# Altium PCB STM32F0 Bigger version 3.PcbDoc
Units mil, origin at the board's own origin, x right, y up, seen from the top; angles counter-clockwise.
Board outline 1865.23 x 1135.12 mil, 2 copper layers (Top Layer, Bottom Layer); 23 components, 26 nets, 129 pads, 11 vias.
Unrouted connection lines stored in the file: 2.
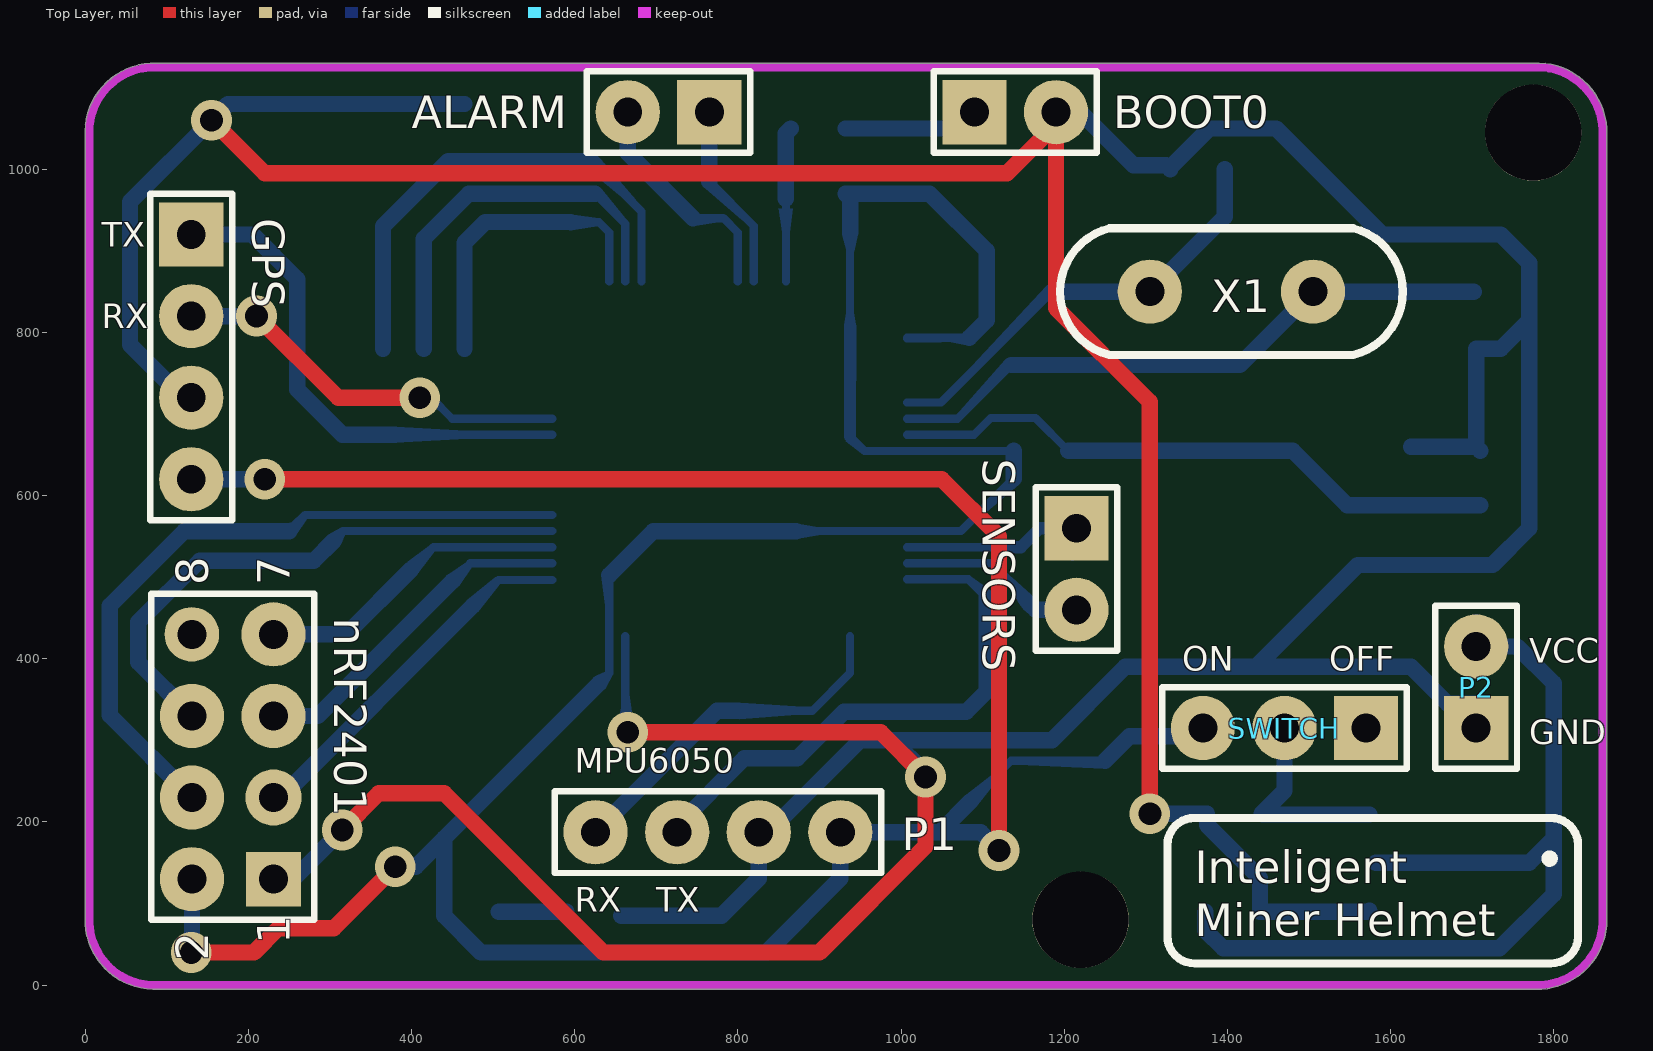
[diagram p0: Top Layer view]
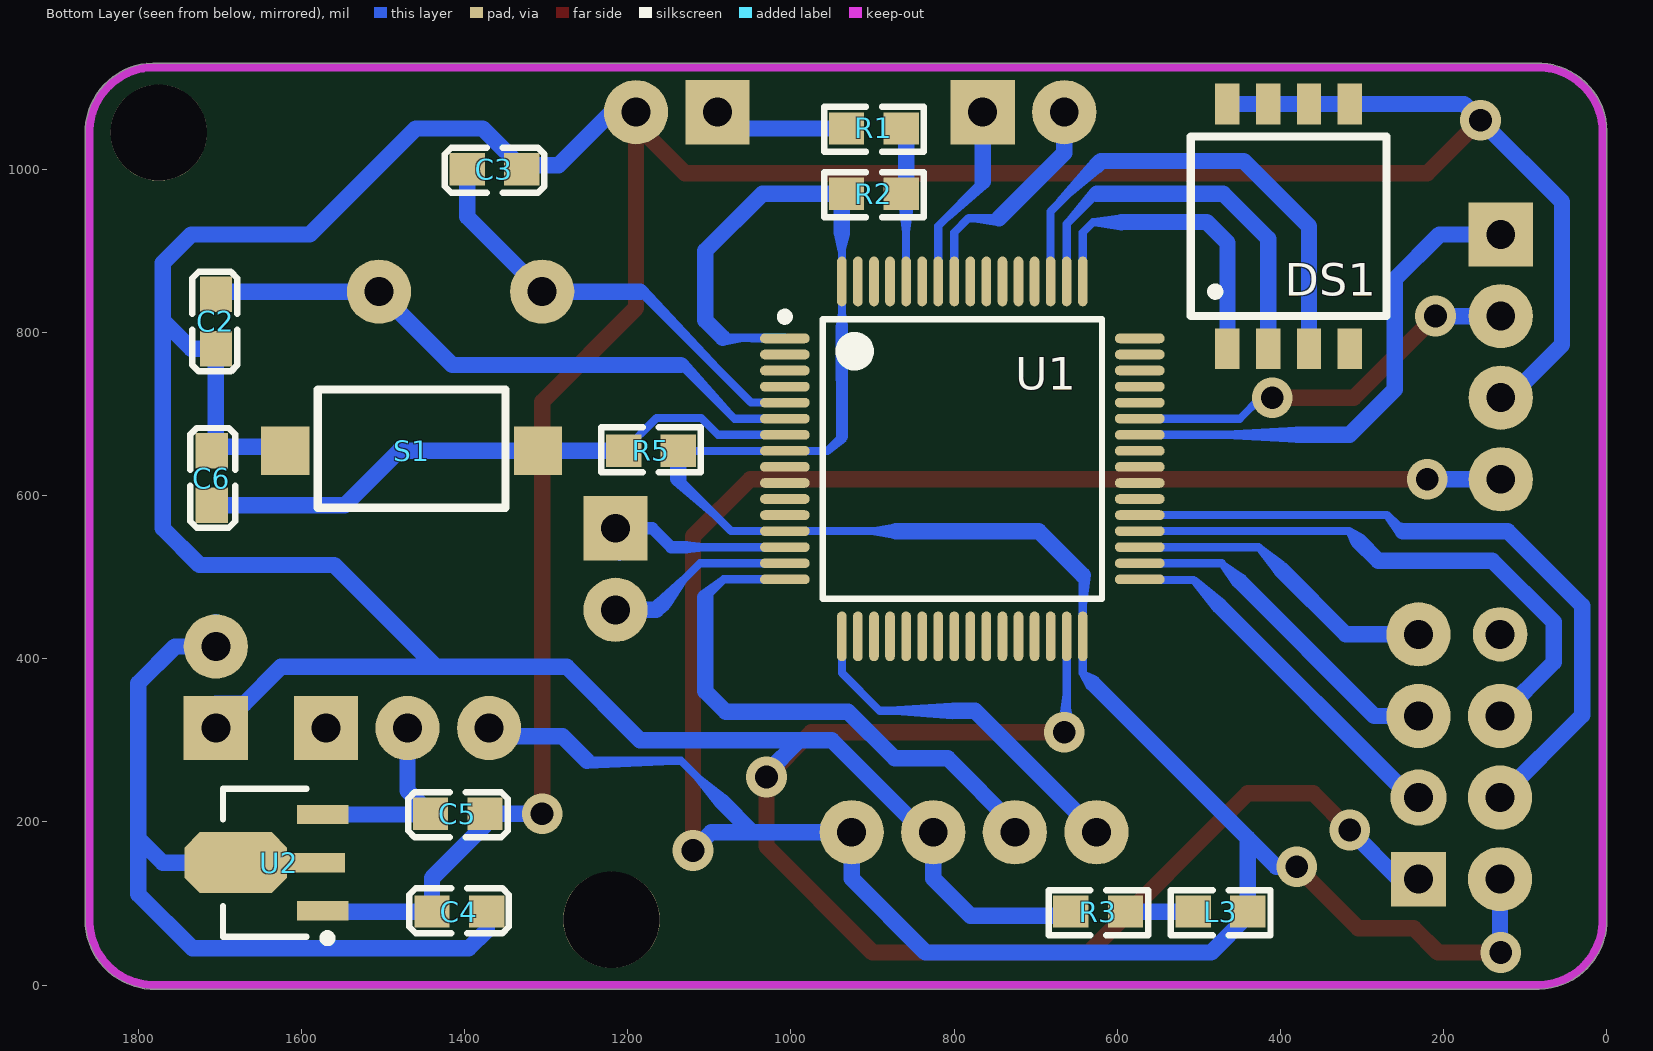
[diagram p1: Bottom Layer view, seen from below]

## Layer stack, top to bottom
Top Solder: solder mask 0.4, Solder Resist, Dk 3.5
Top Layer: signal copper 1.4
Dielectric 1: dielectric 12.6, FR-4, Dk 4.8
Bottom Layer: signal copper 1.4
Bottom Solder: solder mask 0.4, Solder Resist, Dk 3.5

## Board outline
-0.01,75 -0.01,1039.85 cw(c85,1045) 79.69,1130.01 cw(c80,1125) 80,1130.01 1774.85,1130.01 cw(c1780,1045) 1865.01,1050.31 cw(c1860,1050) 1865.02,1050 1865.02,85.15 cw(c1780,80) 1865.17,80 cw(c1780,80) 1785.31,-5.01 cw(c1785,0) 1785,-5.01 90.15,-5.01 cw(c85,80) -0.01,74.69 cw(c5,75)

## Design rules (kind name [scope] priority, off if disabled: settings)
Clearance [All] p1: gap=6
PolygonConnect [All] p1: connectstyle=Relief reliefconductorwidth=10 reliefentries=4 polygonreliefangle="90 Angle" airgapwidth=10
RoomDefinition STM32F0 [InComponentClass('STM32F0')] p1: confinementstyle=ConfineIn formatcopy=TRUE lockcomponents=FALSE outline 1860,0 0,0 0,1130 1860,1130
RoutingVias [All] p1: holewidth=28 width=50 viastyle="Through Hole" minholewidth=28 minwidth=50 maxholewidth=28 maxwidth=50
SolderMaskExpansion [All] p1: expansion=4
Width [All] p1: maxlimit=25 minlimit=10 preferedwidth=20
29 further rules are at their usual default settings.

## Classes and differential pairs
component class STM32F0: ALARM BOOT0 C2 C3 C4 C5 C6 DS1 GPS L3 nRF2401 P1 P2 R1 R2 R3 R5 S1 U1 X1

## Components (designator, comment, footprint, x,y, rotation, side; value= is the part's Value field where it differs from the comment)
ALARM "Header 2" HDR1X2#1 765,1070 r0 top
BOOT0 "Header 2" HDR1X2#2 1090,1070 r0 top (schematic designator P4)
C2 "Cap" CAP-0603 1705,780 r90 bottom
C3 "Cap" CAP-0603 1330,1000 r0 bottom
C4 "Cap" CAP-0603 1440,90 r180 bottom
C5 "Cap" CAP-0603 1375,210 r0 bottom
C6 "Cap" CAP-0603 1710,655 r270 bottom
DS1 "Dial Switch" DS-P4 410,935 r0 bottom
GPS "Header 4" HDR1X4#1 130,920 r270 top (schematic designator P3)
L3 "LED" RES-0603 440,90 r0 bottom
nRF2401 "Header 4X2" HDR2X4 230.81,129.9 r90 top (schematic designator P5)
P1 "Header 4" HDR1X4#2 925.59,187.36 r180 top
P2 "Header 2" HDR1X2#2 1705,315 r90 top
R1 "510" RES-0603 865,1050 r0 bottom
R2 "10K" RES-0603 865,970 r0 bottom
R3 "1K" RES-0603 590,90 r0 bottom
R5 "100K" RES-0603 1205,655 r180 bottom
S1 "SW-SPST" CP-SW 1310,655 r0 bottom
SENSORS "Comment" HDR1X2#1 1215,560 r90 top
SWITCH "Comment" HDR1X3 1570,315 r0 top
U1 "STM32F051R8" LQFP64_L 790,645 r180 bottom
U2 "HT7333" SOT89N 1645,150 r0 bottom
X1 "XTAL" 晶振-1 1505,850 r180 top

## Footprints (in the part's own frame and the unit in brackets; to place one, negate y for a bottom-side part, rotate by r counter-clockwise, add the part's x,y. Pads: shape width x height; smd on the part's side, far side on the other; paste and mask are expansions set on the pad)
CAP-0603 [mm]
  rect 1.1x1 smd: 1(0,0) 2(1.7,0)
  silkscreen extent -0.71,-0.67 2.39,0.73
CP-SW [mm]
  rect 1.5x1.5 smd: 1(0,0) 2(7.874,0)
  silkscreen extent 1.02,-1.91 6.86,1.78
DS-P4 [mil]
  rect 29.92x50 smd: 1(55,155) 2(5,155) 3(-45,155) 4(-95,155) 5(55,-145) 6(5,-145) 7(-45,-145) 8(-95,-145)
  silkscreen extent -140,-105 100,115
HDR1X2#1 [mm] "Connector; Header; 2 Position"
  rect 2x2 hole 0.9: 1(0,0)
  round 2 hole 0.9: 2(-2.54,0)
  silkscreen extent -3.81,-1.27 1.27,1.27
HDR1X2#2 [mm] "Connector; Header; 2 Position"
  rect 2x2 hole 0.9: 1(0,0)
  round 2 hole 0.9: 2(2.54,0)
  silkscreen extent -1.27,-1.27 3.81,1.27
HDR1X3 [mm] "Connector; Header; 3 Position"
  rect 2x2 hole 0.9: 1(0,0)
  round 2 hole 0.9: 2(-2.54,0) 3(-5.08,0)
  silkscreen extent -6.35,-1.27 1.27,1.27
HDR1X4#1 [mm] "Connector; Header; 4 Position"
  rect 2x2 hole 0.9: 1(0,0)
  round 2 hole 0.9: 2(2.54,0) 3(5.08,0) 4(7.62,0)
  silkscreen extent -1.27,-1.27 8.89,1.27
HDR1X4#2 [mm] "Connector; Header; 4 Position"
  round 2 hole 0.9: 1(0,0) 2(2.54,0) 3(5.08,0) 4(7.62,0)
  silkscreen extent -1.27,-1.27 8.89,1.27
HDR2X4 [mm] "Connector; Header; 4x2 Position"
  rect 1.7x1.7 hole 0.9: 1(0,0)
  round 2 hole 0.9: 2(0,2.54) 4(2.54,2.54) 5(5.08,0) 6(5.08,2.54) 7(7.62,0)
  round 1.75 hole 0.9: 3(2.54,0)
  round 1.7 hole 0.9: 8(7.62,2.54)
  silkscreen extent -1.27,-1.27 8.89,3.81
LQFP64_L [mm] "Thin QFP, 64-Leads, Body 10x10mm, Pitch 0.5mm, IPC High Density"
  oval 1.55x0.301 smd: 1(-5.525,3.75) 2(-5.525,3.25) 3(-5.525,2.75) 4(-5.525,2.25) 5(-5.525,1.75) 6(-5.525,1.25) 7(-5.525,0.75) 8(-5.525,0.25) 9(-5.525,-0.25) 10(-5.525,-0.75) 11(-5.525,-1.25) 12(-5.525,-1.75) 13(-5.525,-2.25) 14(-5.525,-2.75) 15(-5.525,-3.25) 16(-5.525,-3.75) 33(5.525,-3.75) 34(5.525,-3.25) 35(5.525,-2.75) 36(5.525,-2.25) 37(5.525,-1.75) 38(5.525,-1.25) 39(5.525,-0.75) 40(5.525,-0.25) 41(5.525,0.25) 42(5.525,0.75) 43(5.525,1.25) 44(5.525,1.75) 45(5.525,2.25) 46(5.525,2.75) 47(5.525,3.25) 48(5.525,3.75)
  oval 0.301x1.55 smd: 17(-3.75,-5.525) 18(-3.25,-5.525) 19(-2.75,-5.525) 20(-2.25,-5.525) 21(-1.75,-5.525) 22(-1.25,-5.525) 23(-0.75,-5.525) 24(-0.25,-5.525) 25(0.25,-5.525) 26(0.75,-5.525) 27(1.25,-5.525) 28(1.75,-5.525) 29(2.25,-5.525) 30(2.75,-5.525) 31(3.25,-5.525) 32(3.75,-5.525) 49(3.75,5.525) 50(3.25,5.525) 51(2.75,5.525) 52(2.25,5.525) 53(1.75,5.525) 54(1.25,5.525) 55(0.75,5.525) 56(0.25,5.525) 57(-0.25,5.525) 58(-0.75,5.525) 59(-1.25,5.525) 60(-1.75,5.525) 61(-2.25,5.525) 62(-2.75,5.525) 63(-3.25,5.525) 64(-3.75,5.525)
  silkscreen extent -5.65,-4.35 4.35,4.55, body extent -5,-5 5,5, height 1.6
RES-0603 [mm] "1/10W"
  rect 1.1x1 smd: 1(0,0) 2(1.7,0)
  silkscreen extent -0.71,-0.67 2.39,0.73
SOT89N [mm] "SOT89, 3-Leads, Body 4.5x2.4 mm, Pitch 1.5mm, Lead Span 4.1mm, IPC Medium Density"
  rect 1.6x0.6 smd: 1(-1.8,1.5) 3(-1.8,-1.5)
  rect 1.8x0.6 smd: 2(-1.6,0)
  oct 3.2x1.9 smd: 2(0.9,0)
  silkscreen extent -2.07,-2.3 1.3,2.47, body extent -1.3,-2.3 1.3,2.3, height 1.6
晶振-1 [mm] "5.08MM"
  round 2 hole 0.9: 1(0,0) 2(5.08,0)
  silkscreen extent -2.79,-1.97 7.87,1.97

## Part data
ALARM BOOT0 P2: "Header, 2-Pin"
C2 C3 C4 C5 C6: "Capacitor"
DS1: library part DS-4
GPS P1: "Header, 4-Pin"
L3: "LED发光管"
nRF2401: "Header, 4-Pin, Dual row"
R1 R2 R3 R5: library part R, "电阻"
S1: "Single-Pole, Single-Throw Switch"
U1: library part STM32F051R8T6
U2: library part HT7530-1, "3.0V 100mA Low Power,  Low Dropout Voltage (LDO) Regulator"
X1: "Crystal Oscillator"

## Free pads (board coordinates)
  round 118.11 hole 118.11: 0(1220,80) 1(1775,1045)

## Via types
v1: diameter 50, hole 28, Top Layer to Bottom Layer, tented both sides, 11 vias

## Nets (pads, with @x,y where several pads share a name; then routed paths per layer and width w, separated by ;. In a path a pad name is that pad's centre, name@x,y a point inside that pad or via, vN(x,y) a via of type N, cw(c..) or ccw(c..) an arc to the next point about the centre after c; other vN are vias at no path point)
GND: BOOT0.2 C2.1 C3.1 C4.1 C5.1 C6.1 DS1.5 DS1.6 DS1.7 DS1.8 GPS.3 nRF2401.1 P1.2 P2.1 R3.2 S1.2 U1.12 U1.31 U1.63 U2.1 | length 7672
  Top Layer w20: v1(155,1060) 220,995 1130,995 1190,1055 BOOT0.2 1190,830 1305,715 v1(1305,210) ; v1(315,190) 360,235 440,235 635,40 900,40 1030,170 v1(1030,255) 975,310 v1(665,310)
  Bottom Layer w10: v1@662.05,310 U1.31
  Bottom Layer w20: GPS.3@130,703.37 GPS.3 120,720 55,785 55,960 v1(155,1060) 175,1080 DS1.8 DS1.7 DS1.6 DS1.5 ; nRF2401.1 254.9,129.9 v1(315,190) ; R3.2@656.93,85 780,85 825.59,130.59 825.59,175.59 950,300 990,300 ; v1(1030,255) 1030,260 990,300 ; BOOT0.2 1220,1070 1285,1005 C3.1@1325,1005 ; v1(1305,210) C5.1 1375,196.22 1440,131.22 C4.1 1573.19,90 U2.1 ; C3.1 1330,1002.25 1377.75,1050 1460,1050 1590,920 1735,920 1770,885 1770,815 ; 1435,390 1560,515 1725,515 1770,560 1770,815 ; S1.2@1625,660 C6.1@1705,660 ; P2.1@1705,345 1670,345 1625,390 1275,390 1185,300 990,300 ; C6.1 C6.1@1705,660 ; C6.1@1705,660 C2.1 1735,780 1770,815
NetC2_2: C2.2 U1.6 X1.1 | length 758.9
  Bottom Layer w10: U1.6 1069.21,694.21 1135,760
  Bottom Layer w20: 1135,760 1415,760 X1.1 C2.2@1701.93,850
NetC3_2: C3.2 U1.5 X1.2 | length 542
  Bottom Layer w10: U1.5@1007.6,713.98 U1.5 1048.9,713.9 1185,850
  Bottom Layer w20: 1185,850 X1.2 1396.93,941.93 C3.2
NetC5_2: C5.2 SWITCH.2 U2.3 | length 239.2
  Bottom Layer w20: SWITCH.2@1470,305 1470,238.07 C5.2 1442.87,209.06 U2.3
NetC6_2: C6.2 R5.1 S1.1 U1.7 | length 755.3
  Bottom Layer w10: U1.7 1089.53,674.53 1110,695 1165,695 R5.1
  Bottom Layer w20: R5.1 S1.1 1480,655 1546.93,588.07 C6.2
NetDS1_1: DS1.1 U1.49 | length 383.2
  Bottom Layer w10: 595,935 630,935 642.36,922.64 U1.49
  Bottom Layer w20: DS1.1 465,910 490.32,935.32 594.68,935.32 595,935
NetDS1_2: DS1.2 U1.50 | length 490.6
  Bottom Layer w10: 625,970 662.05,932.95 U1.50
  Bottom Layer w20: DS1.2 415,915 470,970 625,970
NetDS1_3: DS1.3 U1.51 | length 611.2
  Bottom Layer w10: 626.71,1003.29 681.73,948.27 U1.51
  Bottom Layer w20: DS1.3 365,930 445,1010 620,1010 626.71,1003.29
NetL3_2: L3.2 R3.1 | length 83.1
  Bottom Layer w20: L3.2 R3.1
NetP1_1: P1.4 U1.17 | length 437.8
  Bottom Layer w10: 801.28,336.28 891.28,336.28 937.56,382.56 937.56,427.4 U1.17
  Bottom Layer w20: P1.4 774.51,336.28 801.28,336.28
NetP1_2: P1.3 U1.16 | length 677.4
  Bottom Layer w10: U1.16 1082.64,497.36 1105,475
  Bottom Layer w20: P1.3 725.59,195.44 808,277.85 872.85,277.85 930,335 1080,335 1105,360 1105,475
NetP3_1: GPS.1 U1.42 | length 633.2
  Bottom Layer w10: 380.01,674.53 U1.42
  Bottom Layer w20: GPS.1@120,920 GPS.1 205,920 260,865 260,730 315.47,674.53 380.01,674.53
NetP3_2: GPS.2 U1.43 | length 494.6
  Top Layer w20: v1(210,820) 310,720 v1(410,720)
  Bottom Layer w10: v1(410,720) 424.11,720 449.9,694.21 U1.43
  Bottom Layer w20: GPS.2 v1(210,820)
NetP4_2: BOOT0.1 R1.2 | length 166.4
  Bottom Layer w20: R1.2 1070,1050 BOOT0.1
NetP5_3: nRF2401.3 U1.33 | length 452.1
  Bottom Layer w10: 475,465 506.54,496.54 U1.33@572.48,496.54
  Bottom Layer w20: nRF2401.3 239.9,229.9 475,465
NetP5_4: nRF2401.4 U1.37 | length 865.4
  Bottom Layer w10: 250,556.42 269.69,576.1 U1.37
  Bottom Layer w20: nRF2401.4 30,330.71 30,465 121.42,556.42 250,556.42
NetP5_5: nRF2401.5 U1.34 | length 419.2
  Bottom Layer w10: 450,495 472.05,517.05 U1.34
  Bottom Layer w20: nRF2401.5 284.9,329.9 450,495
NetP5_6: nRF2401.6 U1.36 | length 696
  Bottom Layer w10: 305,545 316.42,556.42 U1.36
  Bottom Layer w20: nRF2401.6 65,395.71 65,445 140.31,520.31 280.31,520.31 305,545
NetP5_7: nRF2401.7 U1.35 | length 385.9
  Bottom Layer w10: 400,510 426.73,536.73 U1.35
  Bottom Layer w20: nRF2401.7 319.9,429.9 400,510
NetP6_1: SENSORS.1 U1.14 | length 233.7
  Bottom Layer w10: U1.14 1128.27,536.73 ; SENSORS.1@1198.27,536.73 SENSORS.1@1210,525
  Bottom Layer w15: 1128.27,536.73 1146.73,536.73 1170,560 SENSORS.1
NetP6_2: SENSORS.2 U1.15 | length 223.6
  Bottom Layer w10: U1.15 1111.61,517.05 1155,473.65
  Bottom Layer w20: 1159.3,465.93 1165.23,460 SENSORS.2
NetP7_1: ALARM.2 U1.57 | length 270.1
  Bottom Layer w10: 745,940 782.16,940 799.84,922.32 U1.57
  Bottom Layer w20: ALARM.2@665,1055 665,1020 745,940
NetP7_2: ALARM.1 U1.58 | length 215.1
  Bottom Layer w10: 765,985 819.53,930.47 U1.58
  Bottom Layer w20: 765,985 ALARM.1@765,1055
NetR1_1: R1.1 R2.1 U1.60 | length 190
  Bottom Layer w10: U1.60 R2.1@858.9,963.9
  Bottom Layer w20: R2.1@858.9,963.9 858.9,1043.9 R1.1
VCC: GPS.4 L3.1 nRF2401.2 P1.1 R2.2 R5.2 SWITCH.3 U1.1 U1.8 U1.13 U1.32 U1.64 | length 5061.3
  Top Layer w20: v1(130,40) 206.95,40 236.53,69.58 304.58,69.58 v1(380,145) ; v1(220,620) 1050,620 1120,550 v1(1120,165)
  Bottom Layer w10: nRF2401.2 nRF2401.2@135.95,129.9 ; 630,370 642.36,382.36 U1.32 642.36,502.36 ; 871.42,556.42 U1.13 1073.58,556.42 1138.07,620.91 ; 937.46,672.54 955.16,654.84 1137.91,654.84 R5.2 ; 937.64,807.36 U1.64 937.64,922.36 ; U1.1 1047.43,792.64 1047.61,792.46 ; U1.1@1007.52,793.46 1083.46,793.46 ; 1085,225 1135,275 1250,275
  Bottom Layer w15: 937.46,672.54 937.64,807.36
  Bottom Layer w20: GPS.4 v1(220,620) ; v1@130.81,40.81 nRF2401.2 ; v1(380,145) 405,145 440,180 ; 630,370 440,180 ; 642.36,502.36 696.42,556.42 871.42,556.42 ; 937.64,922.36 937.64,964.29 R2.2 1035,970 1105,900 1105,815 1083.46,793.46 ; 1085,225 1047.36,187.36 ; v1(1120,165) 1097.64,187.36 1047.36,187.36 ; 1138.07,620.91 R5.2 ; 1250,275 1280,305 SWITCH.3@1370,305 ; 440,180 L3.1 440,85 485,40 835,40 925.59,130.59 P1.1 1047.36,187.36
VCC_IN: C4.2 P2.2 U2.2 | length 1101.6
  Bottom Layer w20: C4.2 1373.07,66.93 1395,45 1733.49,45 1800,111.51 1800,180 ; U2.2@1582.01,150 1680.43,150 1770,150 1800,180 ; P2.2@1705,445 1735,415 1755,415 1800,370 1800,180
pads on no net: DS1.4 nRF2401.8 SWITCH.1 U1.2 U1.3 U1.4 U1.9 U1.10 U1.11 U1.18 U1.19 U1.20 U1.21 U1.22 U1.23 U1.24 U1.25 U1.26 U1.27 U1.28 U1.29 U1.30 U1.38 U1.39 U1.40 U1.41 U1.44 U1.45 U1.46 U1.47 U1.48 U1.52 U1.53 U1.54 U1.55 U1.56 U1.59 U1.61 U1.62

## Keep-outs
Keep-Out Layer:
  lines w10: 85,0 1785,0 ccw(c1780,80) 1860,85 1860,1050 ccw(c1780,1045) 1775,1125 80,1125 ccw(c85,1045) 5,1040 5,75 ccw(c85,80) 90,0

## Other copper
Bottom Layer:
  region net VCC: 1249.9,265.01 1249.56,265.35 1249.56,274.25 1146.6,274.25 1142.66,270.3
  region net NetP5_4: 258.84,551.89 250.76,553.97 250.76,566.44 252.84,566.44 266.51,580.11 271.47,575.15 271.47,571
  region net NetP5_6: 313.48,539.98 313.48,541.28 300.77,553.98 314.72,561.08 314.42,560.98 314.42,555.08 318.14,551.35
  region net VCC: 632.42,502.53 641.53,501.97 642.11,501.39 637.9,497.17 637.9,460.83
  region net VCC: 870.11,566.37 870.26,566.22 870.26,546.67 901.66,552.12 898.82,551.61 898.39,552.05 898.39,561.14
  region net NetC3_2: 1178.78,857.05 1180.51,855.32 1180.51,845.21 1175.03,845.21 1052.7,722.07
  region net NetC2_2: 1127.51,766.23 1134.25,759.5 1128.46,759.5 1067.7,698.74
  region net NetP1_2: 1086.65,327.74 1079.48,334.91 1079.48,337.42 1087.73,337.42 1108.71,358.4
  region net NetP3_1: 380.08,684.42 380.08,664.79 380.33,664.54 379.19,664.79 468.32,669.73 468.32,678.59 467.56,679.35
  region net NetDS1_1: 594.27,944.95 593.76,943.15 596.93,925.44 627.48,930.25 629.29,931.51 629.29,939.97
  region net NetDS1_2: 633.32,975.48 633.32,975.02 629.39,971.09 664.4,936.09 665.32,936.09
  region net NetDS1_3: 635.52,1007.75 635.52,1003.73 621.99,994.86 660.75,963.23 674.55,962.32
  region net NetP7_2: 759.75,976.75 759.75,977.6 766.93,984.78 805.37,946.33 805.37,937.69
  region net NetP7_1: 745.21,930.06 742.13,933.82 746.5,938.19 749.26,935.44 779.37,935.44
  region net VCC: 646.7,380.31 637.21,363.39 627.53,379.52 637.4,384.3
  region net NetP6_2: 1166.05,472.69 1152.55,459.18 1151.33,459.18 1146.59,464.78 1127.73,494.22 1133.57,500.06 1135.51,500.06
  region net VCC: 1092.24,218.31 1080.12,230.43 1080.12,233.34 1112.53,258.48 1108.86,255.85 1119.31,252.8
  region net NetP1_1: 802.99,346.08 801.82,344.91 801.82,326.05 880.76,331.67 880.42,331.58 880.26,331.75 880.26,340.97
  region net GND: 670,335 663.91,377.9 655,330
  region net VCC: 1144.35,613.18 1137.84,619.69 1134.23,619.69 1134.23,610.85 1096.29,572.91
  region net NetP5_3: 470.01,473.56 483.41,460.15 483.65,460.07 508.14,491.34 502.63,496.85 502.63,499.72
  region net NetP5_5: 458.28,489.27 458.28,490.79 445.36,503.71 467.05,518.46 468.49,520.54 468.49,517.59 473.91,512.16
  region net NetP5_7: 395.18,518.63 408.55,505.25 408.46,505.2 428.56,531.65 421.78,538.44 421.78,538.64
  region net VCC: 932.43,666.71 937.01,671.29 940.76,671.29 940.76,662.33 951.37,651.72
  region net VCC: 944.35,810.31 942.29,812.37 942.29,823.83
  region net VCC: 930.26,809.31 931.88,809.31 933.28,810.72 932.92,811.08 932.92,823.79
  region net NetP6_1: 1128.54,544.17 1128.54,529.62 1128.21,529.3 1128.21,529.37 1106.55,531.76 1106.55,541.4 1106.27,541.68
  region net VCC: 1082.93,783.54 1080.45,786.01 1080.45,794.11 1063.74,794.11 1058.45,788.83
  region net VCC: 947.08,919.83 946.9,920.02 928.21,920.02 933.48,899.57 932.83,899.29 942.55,899.29
  region net NetR1_1: 866.98,951.46 850.86,951.46 850.75,951.34 850.31,951.96 854.41,922.58 863.4,922.68 863.51,922.8
  region net NetP1_2: 1111.23,482.76 1104.34,475.87 1099.12,475.87 1084.54,501.76

## Silkscreen, mask and mechanical layers (free items; w line width, h text height)
Top Overlay:
  circle w10: c1795,155 r5
  lines w10: 1830,171.46 ccw(c1796.46,171.46) 1796.46,205 1360,205 ccw(c1360,171.46) 1326.46,171.46 1326.46,60 ccw(c1360,60) 1360,26.46 1796.46,26.46 ccw(c1796.46,60) 1830,60 1830,173.23
  text "TX" at 20,905 h30
  text "RX" at 20,805 h30
  text "VCC" at 1770,395 h30
  text "ON" at 1345,385 h30
  text "OFF" at 1525,385 h30
  text "GND" at 1770,295 h30
  text "MPU6050" at 600,260 h30
  text "Inteligent" at 1360,125 h40
  text "RX" at 600,90 h30
  text "TX" at 700,90 h30
  text "Miner Helmet" at 1360,60 h40

## Text inside footprints (layer, text, board x,y; h text height)
nRF2401: Top Overlay "2" at 150.81,29.9 h40 r90; Top Overlay "1" at 250.81,49.9 h40 r90; Top Overlay "7" at 250.81,489.9 h40 r90; Top Overlay "8" at 150.81,489.9 h40 r90